# EAGLE board LEDLightSticks_V2--03--Molex_Male_BMI_Breakout_PCB_v17 (EAGLE 9.7.0)
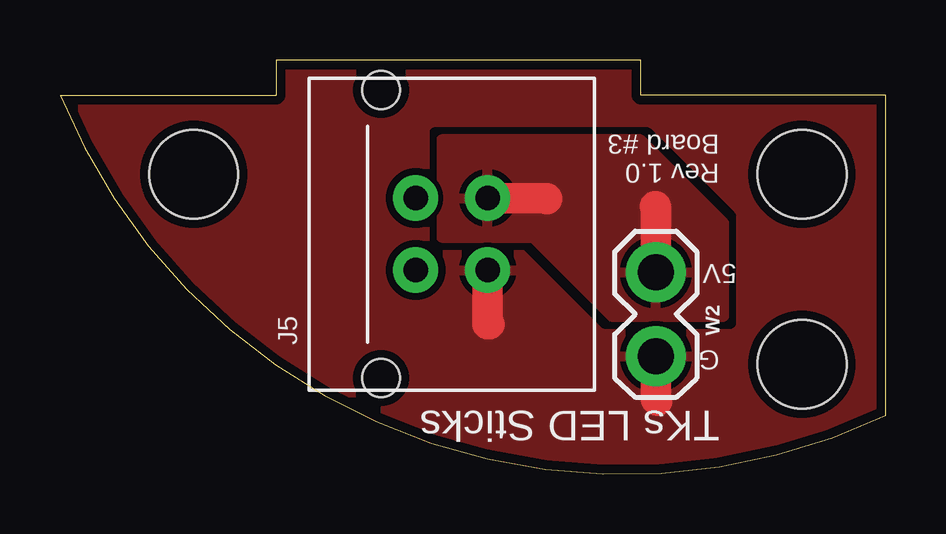
[diagram p0: board, top side]
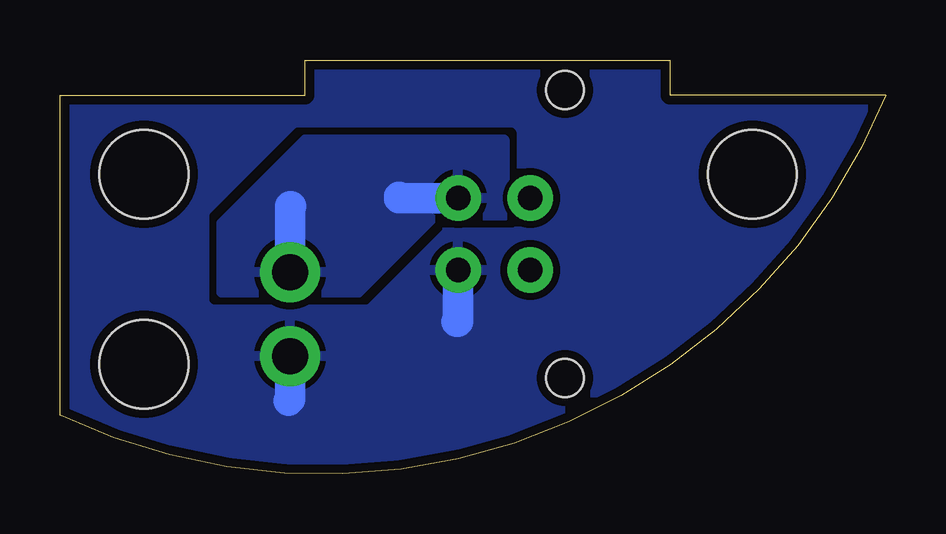
[diagram p1: board, bottom side, seen from below]

Size 34.43 x 17.25 mm. Coordinates in mm from the lower left corner, seen from the top.
Outline: 0,15.79 arc93 34.43,2.45 34.43,15.79 24.21,15.79 24.21,17.25 9.01,17.25 9.01,15.79 0,15.79
Copper layers (1*16): Top 0.035mm / dielectric 1.5mm / Bottom 0.035mm
Design rules "TKs_CustomDRU": minimum track width 10mil, minimum drill 20mil, track to track 8mil, track to pad 8mil, pad to pad 8mil, via to via 8mil, smd to smd 8mil, copper to edge 15mil, drill to drill 15mil, minimum pad ring 12mil, minimum via ring 10mil, stop-mask expansion 4mil, vias tented up to drill 20mil, thermal gap 10mil
Holes 3.7 mm at 30.93,12.48 30.93,4.57 5.57,12.48

## Footprints (pad centres in the part's own frame; a part is rotated, then mirrored left to right if it is on the bottom)
MICROFIT_2X2_VERT_MALE = drill 1.016 pad 1.88: 1 0,0; 2 -3,0; 3 0,3; 4 -3,3 | hole 1.57: 4.5,4.45; -7.5,4.45
1X02_1.5MM = drill 1.5 pad 2.5: 1 3.5,0; 2 0,0

## Placement (x,y rotation side)
J5  MOLEX-MICRO-FIT-2X02VERT-MALE-BMI  [MICROFIT_2X2_VERT_MALE]  17.83,11.5 90 top
W2  Power Out  [1X02_1.5MM]  24.84,4.91 90 top

## Library data of the parts
J5 W2 = LED_Light_Sticks_Library

## Nets
GND: J5.2 W2.2
VIN: J5.1 W2.1

## Tracks (layer width: path | path; a pad name or v marks a point on that pad's centre or on a via)
GND
  Top 1.27: J5.2 17.83,6.25 17.9,6.25 | W2.2 24.84,3.11 24.9,3.05
  Bottom 1.27: J5.2 17.83,6.35 17.9,6.35 | W2.2 24.84,3.11 24.9,3.05
  pour Bottom (isolate 0.305, rank 2): 0.2,0.25 34.2,0.25 34.2,17.04 0.2,17.04
  pour Top (isolate 0.305, rank 2): 0.2,0.25 34.2,0.25 34.2,17.04 0.2,17.04
VIN
  Top 1.27: W2.1 24.84,11.15 24.8,11.15 | J5.1 20.3,11.5 20.3,11.45
  Bottom 1.27: W2.1 24.84,11.15 24.8,11.15 | J5.1 20.3,11.5 20.3,11.55
  pour Top: 15.9,13.94 15.9,9.85 19.64,9.85 19.72,9.82 22.98,6.55 27.7,6.55 27.7,10.46 24.22,13.94
  pour Bottom: 15.9,13.94 15.9,10.75 18.74,10.75 18.82,10.72 21.98,7.55 27.7,7.55 27.7,10.46 24.22,13.94

## Text on the board
tPlace: Rev 1.0 / Board #3 | 5V | G | TKs LED Sticks